# Altium PCB 降压模块.PcbDoc
Units mil, origin at the board's own origin, x right, y up, seen from the top; angles counter-clockwise.
Board outline 803 x 605 mil, 2 copper layers (Top Layer, Bottom Layer); 14 components, 10 nets, 43 pads, 30 vias.
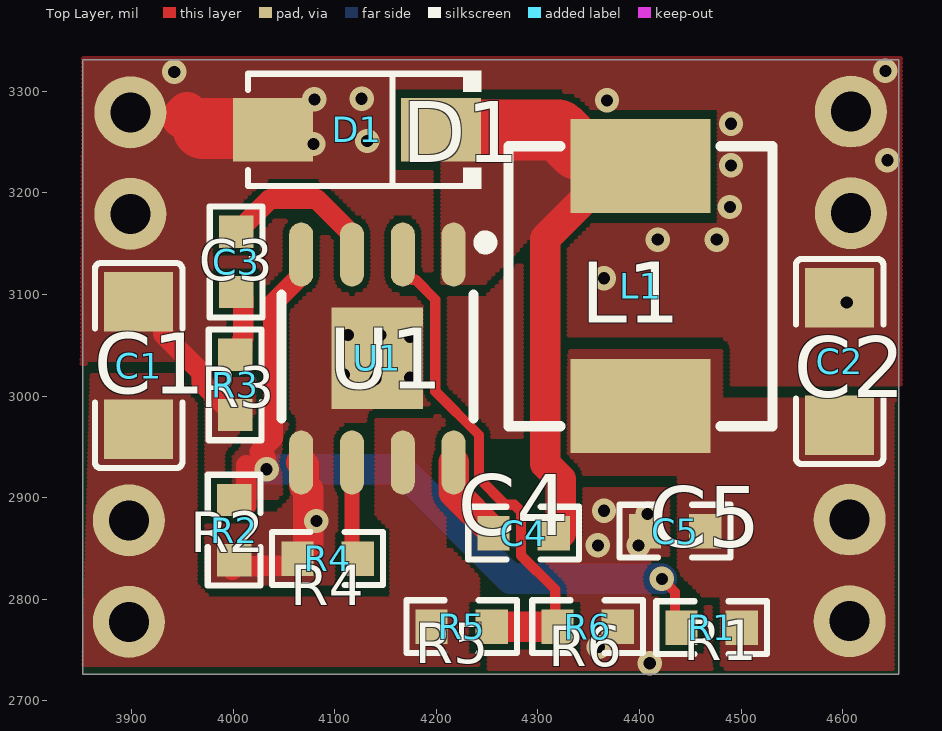
[diagram p0: Top Layer view]
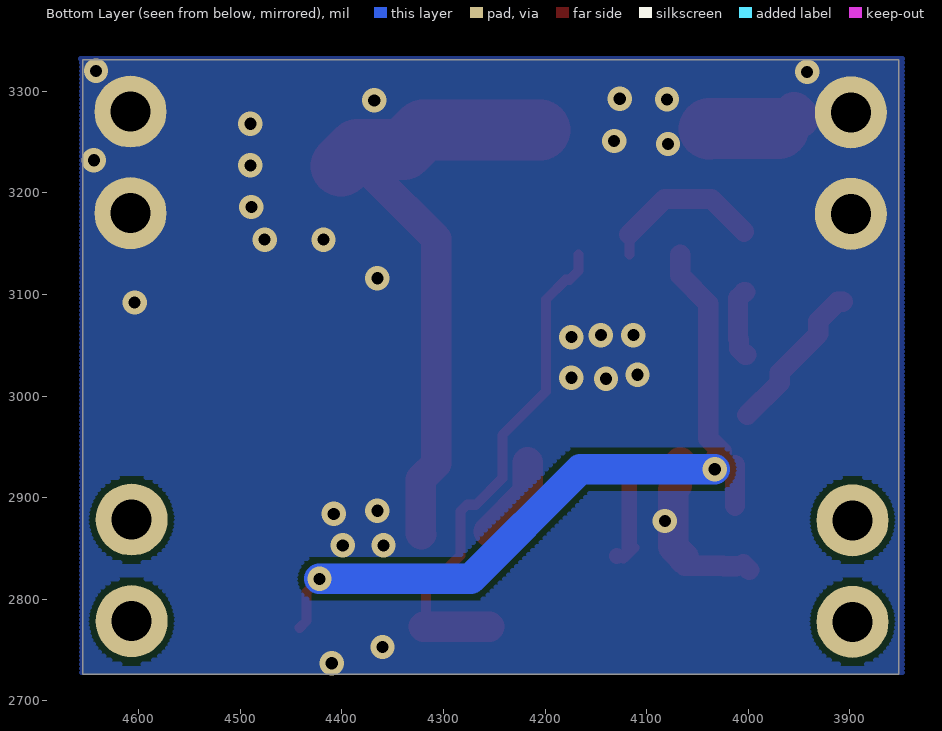
[diagram p1: Bottom Layer view, seen from below]

## Layer stack, top to bottom
Top Solder: solder mask 0.4, Solder Resist, Dk 3.5
Top Layer: signal copper 1.4
Dielectric 1: dielectric 12.6, FR-4, Dk 4.8
Bottom Layer: signal copper 1.4
Bottom Solder: solder mask 0.4, Solder Resist, Dk 3.5

## Board outline
3852,2726 4655,2726 4655,3331 3852,3331

## Design rules (kind name [scope] priority, off if disabled: settings)
Clearance [All] p1: gap=6 ignorepadtopadclearanceinfootprint=FALSE except(0: Arc-Hole Track-Hole SMDPad-Hole THPad-Hole Via-Hole Fill-Hole Poly-Hole Region-Hole Text-Hole; 5: Arc-Arc Arc-Track Track-Track)
ComponentClearance [All] p1: gap=4 collisioncheckmode=3 verticalgap=4 showdistances=FALSE
PolygonConnect [All] p1: connectstyle=Direct reliefconductorwidth=10 reliefentries=4 polygonreliefangle="90 Angle" airgapwidth=10
RoutingVias [All] p1: holewidth=12 width=24 viastyle="Through Hole" minholewidth=5 minwidth=10 maxholewidth=100 maxwidth=100
SolderMaskExpansion [IsVia] p1: expansion=4 istentingtop=TRUE
Width [All] p1: maxlimit=200 minlimit=5 preferedwidth=10
29 further rules are at their usual default settings.

## Classes and differential pairs
component class 降压模块: C3 C4 C5 D1 R1 R3 R5

## Components (designator, comment, footprint, x,y, rotation, side; value= is the part's Value field where it differs from the comment)
C1 "10uf 50v" C1206 3907,3030 r270 top value=22uF
C2 "22uF 6.3v" C1206 4597,3034 r270 top value=22uF
C3 "150pF" R0603 4003,3132 r90 top value=22uF
C4 "100nF" R0603 4286,2865 r0 top value=22uF
C5 "100nF" R0603 4435,2867 r0 top value=22uF
D1 "SS34" "ss34  SMA_L4.3-W2.5-LS5.0-RD" 4122,3262 r180 top
L1 "15uH" 功率电感15uh 4401,3108.11 r270 top
R1 "210k" R0603 4471,2772 r180 top value=210kΩ
R2 "40.2k" R0603 4001,2868 r90 top value=210kΩ
R3 "100k" R0603 4002,3011 r90 top value=210kΩ
R4 "100k" R0603 4093,2840 r0 top value=210kΩ
R5 "100k" R0603 4225,2773 r180 top value=210kΩ
R6 "24.9k" R0603 4349,2773 r180 top value=210kΩ
U1 "MP1584DN" LC-SOIC-8_EP_150mil 4142,3037 r180 top

## Footprints (in the part's own frame and the unit in brackets; to place one, negate y for a bottom-side part, rotate by r counter-clockwise, add the part's x,y. Pads: shape width x height; smd on the part's side, far side on the other; paste and mask are expansions set on the pad)
C1206 [mm]
  rect 1.485x1.728 smd paste-100 mask+0.051: 1(-1.593,0) 2(1.593,0)
  silkscreen extent -2.56,-1.09 2.56,1.09
LC-SOIC-8_EP_150mil [mm]
  rect 2.286x2.54 smd: 0(0,0)
  oval 0.6x1.6 smd: 1(-1.905,-2.6) 2(-0.635,-2.6) 3(0.635,-2.6) 4(1.905,-2.6) 5(1.905,2.6) 6(0.635,2.6) 7(-0.635,2.6) 8(-1.905,2.6)
  silkscreen extent -2.85,-3.05 2.4,1.5
R0603 [mil]
  rect 31.75x34.02 smd paste-3937.01 mask+2: 1(-29.66,0) 2(29.66,0)
  silkscreen extent -55,-26 55,26
"ss34  SMA_L4.3-W2.5-LS5.0-RD" [mm]
  rect 2x1.593 smd paste+0 mask+0.051: 1(-2.1,0) 2(2.1,0)
  silkscreen extent -3.11,-1.48 2.73,1.48
功率电感15uh [mm]
  rect 2.35x3.5 smd paste+0 mask+0.051: 1(-3,0) 2(3,0)
  silkscreen extent -3.5,-3.3 3.5,3.3

## Part data
C1 C2 C3 C4 C5: library part "电容22uf 6.3v x7r", "型号： CGA5L1X7R0J226MT0Y0E / 品牌： TDK / 封装： 1206 / 描述：容值：22uF 精度：±20% 额定电压：6.3V 材质(温度系数)：X7R", JLCPCB Part Class="Extended Part", LCSC Part Name="22uF ±20% 6.3V", Manufacturer=TDK, Manufacturer Part=CGA5L1X7R0J226MT0Y0E, Temperature Coefficient=X7R, Tolerance=±20%, Voltage Rated=6.3V, Add into BOM=yes, Convert to PCB=yes, Datasheet=https://atta.szlcsc.com/upload/public/pdf/source/20190716/C342630_ADB15E5CCD286B86322CE8B53B7BBFDA.pdf, Device=CGA5L1X7R0J226MT0Y0E, Name=22uF, Supplier=LCSC, Supplier Footprint=1206, Supplier Part=C342630, Symbol=CGA5L1X7R0J226MT0Y0E
D1: "型号： SS34 品牌： TWGMC(台湾迪嘉) 封装： SMA 二极管配置：独立式 直流反向耐压(Vr)：40V 平均整流电流(Io)：3A 正向压降(Vf)：550mV@3A 二极管配置：独立式 直流反向耐压(Vr)：40V 平均整流电流(Io)：3A 正向压降(Vf)：950mV@3A", Average Rectified Current (Io)=3A, Forward Voltage (Vf@If)=550mV@3A, JLCPCB Part Class="Extended Part", LCSC Part Name="40V 3A 550mV@3A", Manufacturer=TWGMC(台湾迪嘉), Reverse Leakage Current (Ir)=500uA@40V, Reverse Voltage (Vr)=40V, Add into BOM=yes, Convert to PCB=yes, Datasheet=https://atta.szlcsc.com/upload/public/pdf/source/20200828/C727059_6599B6CAC5F3238B9C33E46794659DBE.pdf, Device=SS34_C727060, Diode Configuration=独立式, Manufacturer Part=SS34, Name=SS34, Supplier=LCSC, Supplier Footprint=SMA, Supplier Part=C727060, Symbol=SS34_C727060
L1: library part "功率电感 15uh", "15uh 功率电感  用于5v降压模块 型号： MWSA1004S-150MT / 品牌： Sunlord(顺络)     电感值：15uH 精度：±20% 额定电流：6.5A 饱和电流(Isat)：7A", DC Resistance (DCR)=45mΩ, JLCPCB Part Class="Extended Part", LCSC Part Name="15uH ±20% 7A", Manufacturer=Sunlord(顺络), Manufacturer Part=MWSA1004S-150MT, Rated Current=6.5A, Ratings=-, Saturation Current (Isat)=7A, Tolerance=±20%, Add into BOM=yes, Convert to PCB=yes, Datasheet=https://atta.szlcsc.com/upload/public/pdf/source/20180327/C151872_2907C77BE933212C728C209604192B1D.pdf, Device=MWSA1004S-150MT_C151872, Name=15uH, Supplier=LCSC, Supplier Footprint=SMD, Supplier Part=C151872, Symbol=MWSA1004-150MT, Type=-
R1 R2 R3 R4 R5 R6: library part res, JLCPCB Part Class="Extended Part", LCSC Part Name="210kΩ ±1% 100mW", Manufacturer=FH(风华), Manufacturer Part=RS-03K2103FT, Operating Temperature Range=-55℃~+155℃, Overload Voltage (Max)=50V, Power(Watts)=100mW, Temperature Coefficient=±100ppm/℃, Tolerance=±1%, Add into BOM=yes, Convert to PCB=yes, Datasheet=https://atta.szlcsc.com/upload/public/pdf/source/20181008/C304716_9BC739B48A9CEB835AD69263E841A8EC.pdf, Device=RS-03K2103FT, Name=210kΩ, Supplier=LCSC, Supplier Footprint=0603, Supplier Part=C304716, Symbol=RS-03K2103FT

## Free pads (board coordinates)
  round 70.87 hole 39.37 paste+0 mask+2: 14(4608,3280) 15(4608,3180) 16(4606.82,2878.43) 17(4606.82,2778.43) 18(3898.94,3279.21) 19(3898.94,3179.21) 20(3897.37,2877.64) 21(3897.37,2777.64)

## Via types
v1: diameter 24, hole 12, Top Layer to Bottom Layer, tented both sides, 28 vias
v2: diameter 24, hole 12, Top Layer to Bottom Layer, 2 vias

## Nets (pads, with @x,y where several pads share a name; then routed paths per layer and width w, separated by ;. In a path a pad name is that pad's centre, name@x,y a point inside that pad or via, vN(x,y) a via of type N, cw(c..) or ccw(c..) an arc to the next point about the centre after c; other vN are vias at no path point)
EN: R5.1 R6.2 U1.2 | length 501.4
  Top Layer w10: U1.2 4167,3123.36 4175.98,3114.38 4179.62,3114.38 4199,3095 4199,3004.58 4242,2961.58 4242,2919 4267.99,2893.01 4276.77,2893.01 4283.22,2886.56 4283.22,2843.35 4317,2809.56 4317,2775.34 R6.2
  Top Layer w30: R5.1 R6.2
GND: C1.1 C2.1 C5.1 D1.2 pad.14 pad.15 pad.18 pad.19 R2.1 R3.1 R4.1 R6.1 U1.0 U1.5 | length 408.4
  Top Layer w10: R3.1@4000.87,2981.34 R3.1
  Top Layer w20: C1.1 3911.78,3092.7 3931.02,3073.47 3931.02,3060.98 3968.99,3023.01 3968.99,3013.22 R3.1@4000.87,2981.34 ; R2.1@3999,2828.68 R2.1@4004.88,2834.56 ; R2.1@4011.88,2832.56 4024.29,2832.56 4024.72,2832.99 4062.46,2832.99 4068.34,2838.87 R4.1@4068.34,2840
  Top Layer w30: R4.1 4063.34,2841.13 4074,2851.79 4074,2907.95 4070.19,2911.76 4070.19,2931.45 U1.5
  Top Layer w40: 3949.6,3274 3954.6,3279 3959.6,3274 ; D1.2@4038.68,3262.64 D1.2
  Top Layer w60: 3970.24,3263.36 4037.96,3263.36 D1.2@4038.68,3262.64
  other v1: 4410,2737 4360,2753 4359,2853 4399,2853 4082,2877 4408,2884 4365,2887 4140,3017 4174,3018 4109,3021 4174,3058 4113,3060 4145,3060 4365,3116 4418,3154 4476,3154 4489,3186 4490,3227 4644,3232 4079,3248 4132,3251 4490,3268 4368,3291 4126.5,3292.5 3942,3319 4642,3320
  other v2: 4604,3092 4080,3292
NetC3_1: C3.1 R3.2 | length 69.2
  Top Layer w20: R3.2 4003.13,3040.66 4009.01,3046.54 4009.01,3055.47 4010,3056.46 4010,3096.46 4004.12,3102.34 C3.1
NetC3_2: C3.2 U1.3 | length 161.6
  Top Layer w10: C3.2 C3.2@4004.13,3161.66 ; U1.3 U1.3@4117,3159.05
  Top Layer w20: C3.2@4004.13,3161.66 4036.47,3194 4082.05,3194 U1.3@4117,3159.05
NetC4_1: C4.1 U1.8 | length 104
  Top Layer w10: C4.1@4248.66,2877.68 4249.22,2878.25 4262.34,2865.13 C4.1@4262.34,2864
  Top Layer w30: U1.8 4217,2905.47 C4.1@4255.46,2867.01
NetC4_2: C4.2 D1.1 L1.1 U1.1 | length 632.2
  Top Layer w30: C4.2@4321.66,2864 4322.49,2864.83 4322.49,2918 4307.1,2933.38 4307.1,3154.96 4367.05,3214.91 4378.36,3226.22 L1.1
  Top Layer w60: D1.1 4319.96,3262 4339.48,3242.48 4367.05,3242.48 4384.74,3242.48 L1.1
NetR1_2: R1.2 R2.2 U1.4 | length 771.5
  Top Layer w10: 4013.01,2932.18 4014.51,2930.68 4030.32,2930.68 v1(4033,2928) ; v1(4422,2820) 4434.85,2807.15 4434.85,2778.49 R1.2
  Top Layer w20: R2.2@4013.01,2891.88 4013.01,2932.18 ; v1@4032.23,2939.13 4026.1,2945.27 4039.19,2958.36 4039.19,3090.89 4067,3118.7 U1.4
  Bottom Layer w30: v1(4033,2928) 4165.31,2928 4273.31,2820 v1(4422,2820)
NetR4_2: R4.2 U1.6 | length 100.2
  Top Layer w10: R4.2@4112,2850.66 R4.2
  Top Layer w15: R4.2@4117,2850.66 U1.6 ; R4.2@4129.34,2842 R4.2@4129.34,2843.13
VIN: C1.2 pad.20 pad.21 R5.2 U1.7
VOUT: C2.2 C5.2 L1.2 pad.16 pad.17 R1.1

## Polygon pours and split planes (outlines as drawn)
GND on Top Layer "GND_L01_P011" (hatched Horizontal grid 4 track 5, remove dead copper, pour order 11): 3853,3334 4657,3334 4657,2730 3850.05,2730
VOUT on Top Layer "VOUT_L01_P003" (hatched Horizontal grid 4 track 5, remove dead copper, pour order 3): 4331,3043 4334,3046 4480,3046 4480,2998 4481,2999 4648,2999 4651,2996 4649,2994 4649,2730 4487,2730 4481,2736 4481,2803 4463,2803 4439,2827 4439,2920 4440,2921 4439,2922 4330,2922
GND on Top Layer "GND_L01_P002" (hatched Horizontal grid 4 track 5, remove dead copper, pour order 2): 4130,3296 4123,3289 4123,3202 3975,3202 3973,3204 3973,3033 3963,3023 3861,3023 3861,3319 3854,3326 4130,3326
VIN on Top Layer "VIN_L01_P001" (hatched Horizontal grid 4 track 5, remove dead copper, pour order 1): 3861,3023 3963,3023 3963,2815 3979,2799 3983,2803 4156,2803 4156,2868 4141,2883 4141,2979 4198,2979 4201,2982 4208,2975 4208,2848 4215,2848 4241,2822 4241,2732 3854,2732 3853,2731
no net on Top Layer "NONET_L01_P010" (hatched Horizontal grid 4 track 5, remove dead copper, pour order 10): 4206,3148 4224,3130 4324,3130 4324,2959 4195.29,2959
GND on Top Layer "GND_L01_P005" (hatched Horizontal grid 4 track 5, remove dead copper, pour order 5): 4343,2916 4347,2920 4439,2920 4439,2827 4426,2814 4426,2729 4329,2729 4328,2728 4319,2737 4319,2838
NetC4_2 on Top Layer "NETC4_2_L01_P000" (hatched Horizontal grid 4 track 5, remove dead copper, pour order 0): 4202,3241 4206,3237 4206,3110 4244,3110 4245,3109 4273,3137 4312,3178 4371,3199 4377,3193 4384,3200 4384,3226
GND on Top Layer "GND_L01_P007" (hatched Horizontal grid 4 track 5, remove dead copper, pour order 7): 4040.66,2897.66 4051,2908 4103,2908 4103,2833 4098,2828 4037,2828 4037,2861 4039,2873
NetR1_2 on Top Layer "NETR1_2_L01_P006" (hatched Horizontal grid 4 track 5, remove dead copper, pour order 6): 4023,2974 4024,2975 4053,2975 4053,2910 4040.66,2897.66 4001,2897.66 4001,2941 4007,2947
GND on Bottom Layer "GND_L02_P012" (hatched Horizontal grid 4 track 5, remove dead copper, pour order 12): 3848,3333 3848,2725 3850,2723 3852,2725 4656,2725 4656,3331 4659,3334

## Silkscreen, mask and mechanical layers (free items; w line width, h text height)
Top Overlay:
  text "D1" at 4166,3230 h60
  text "C3" at 3966,3114 h40
  text "L1" at 4342,3072 h60
  text "U1" at 4094,3007 h60
  text "C1" at 3863,3002 h60
  text "C2" at 4552,2999 h60
  text "R3" at 3968,2989 h40
  text "C4" at 4221,2863 h60
  text "C5" at 4409.34,2850.99 h60
  text "R2" at 3958,2846 h40
  text "R4" at 4056,2794 h40
  text "R1" at 4443,2740 h40
  text "R5" at 4179,2737 h40
  text "R6" at 4310,2734 h40
Top Solder:
  drawing of 226 lines, arcs and shapes, not listed
Bottom Solder:
  drawing of 226 lines, arcs and shapes, not listed
Mechanical 1:
  the board outline again, w10